# Altium PCB PCB1.PcbDoc
Units mil, origin at the board's own origin, x right, y up, seen from the top; angles counter-clockwise.
Board outline 6000 x 4000 mil, 2 copper layers (Top Layer, Bottom Layer), stack 12.8 mil thick; 24 components, 20 nets, 84 pads, 6 vias.
Unrouted connection lines stored in the file: 1.
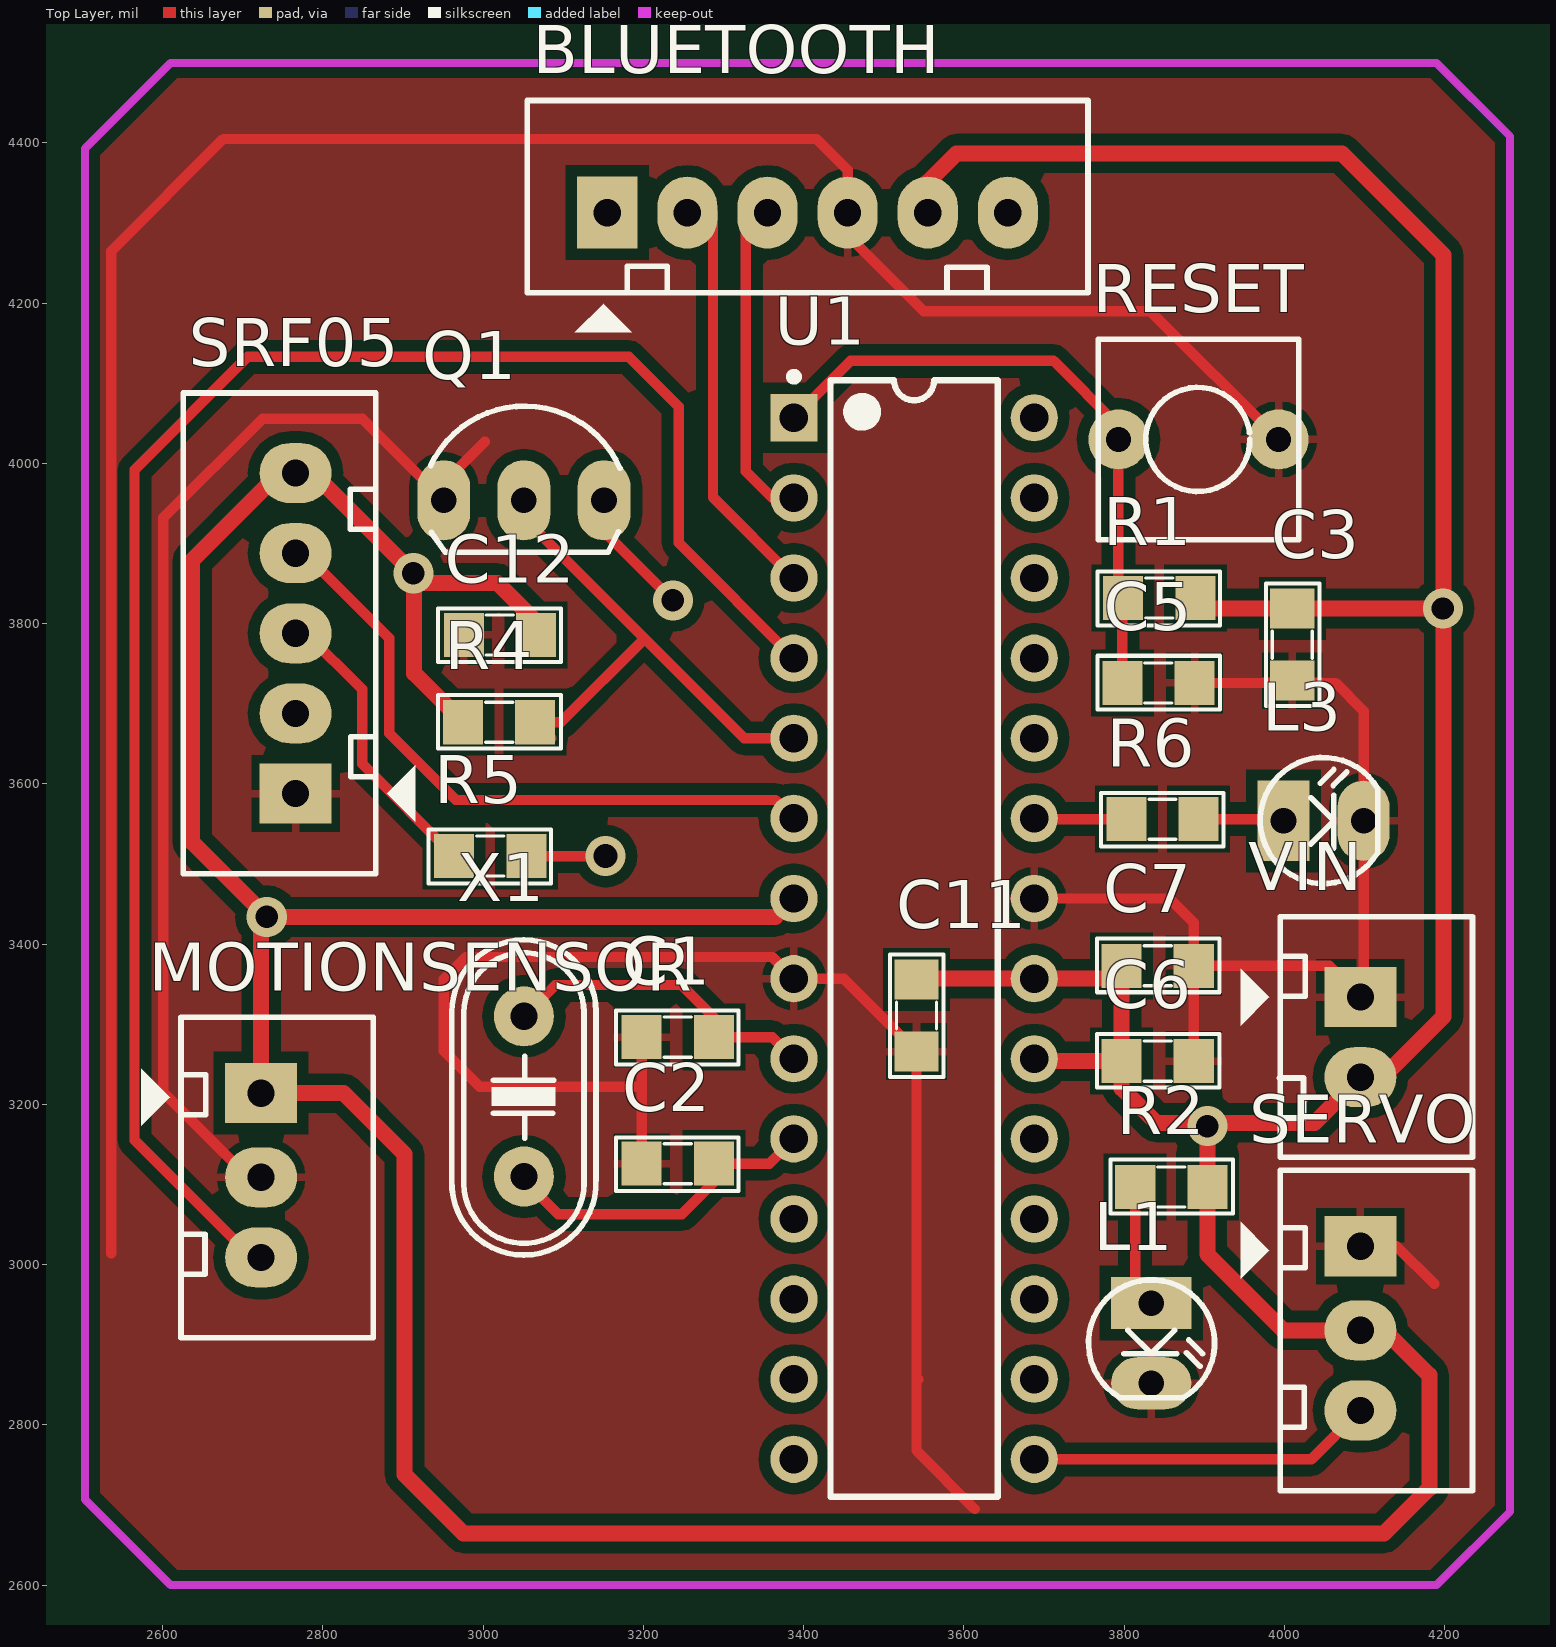
[diagram p0: Top Layer view]
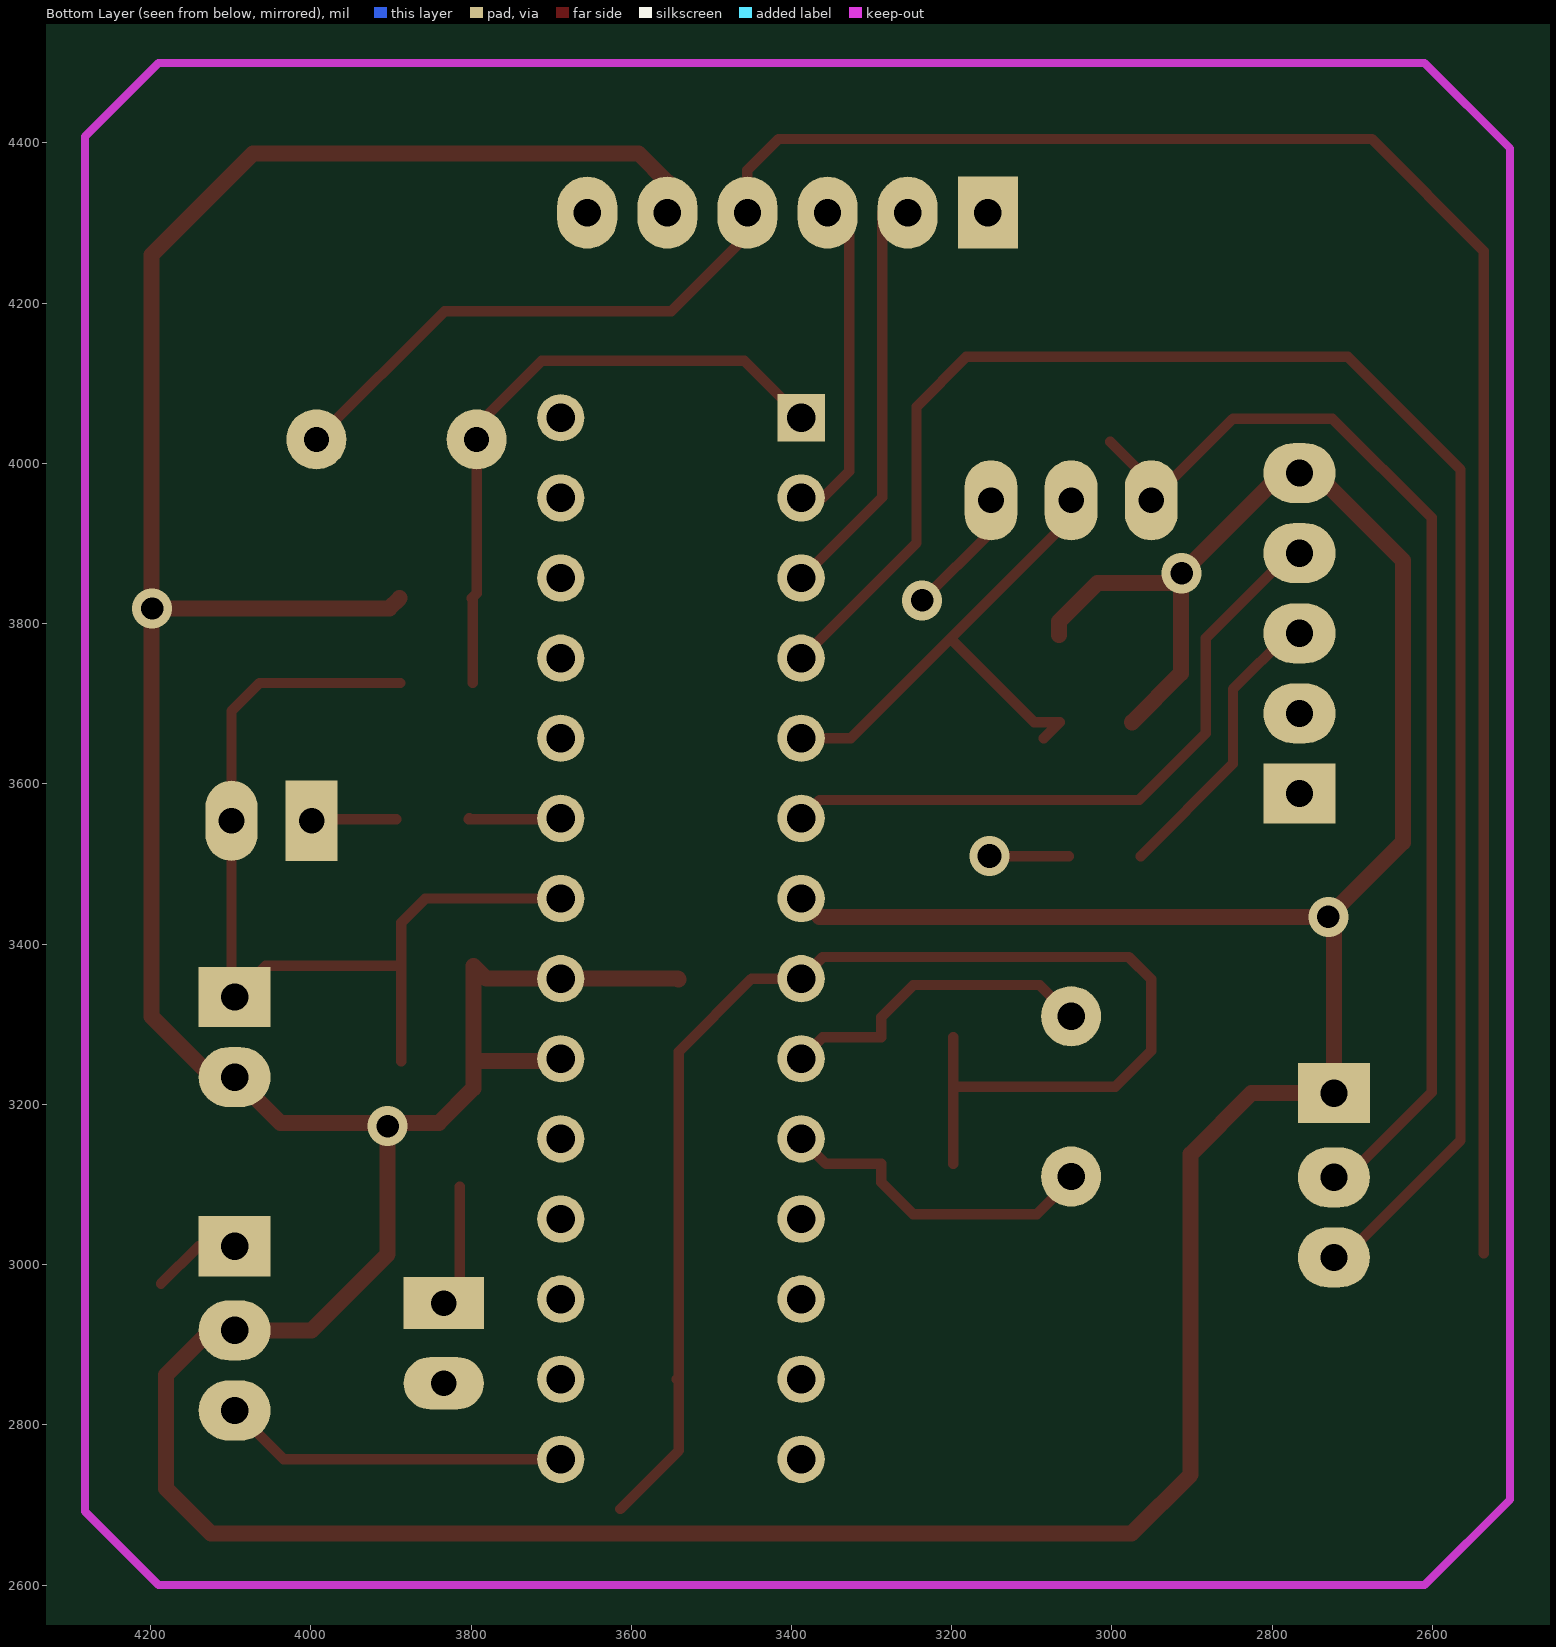
[diagram p1: Bottom Layer view, seen from below]
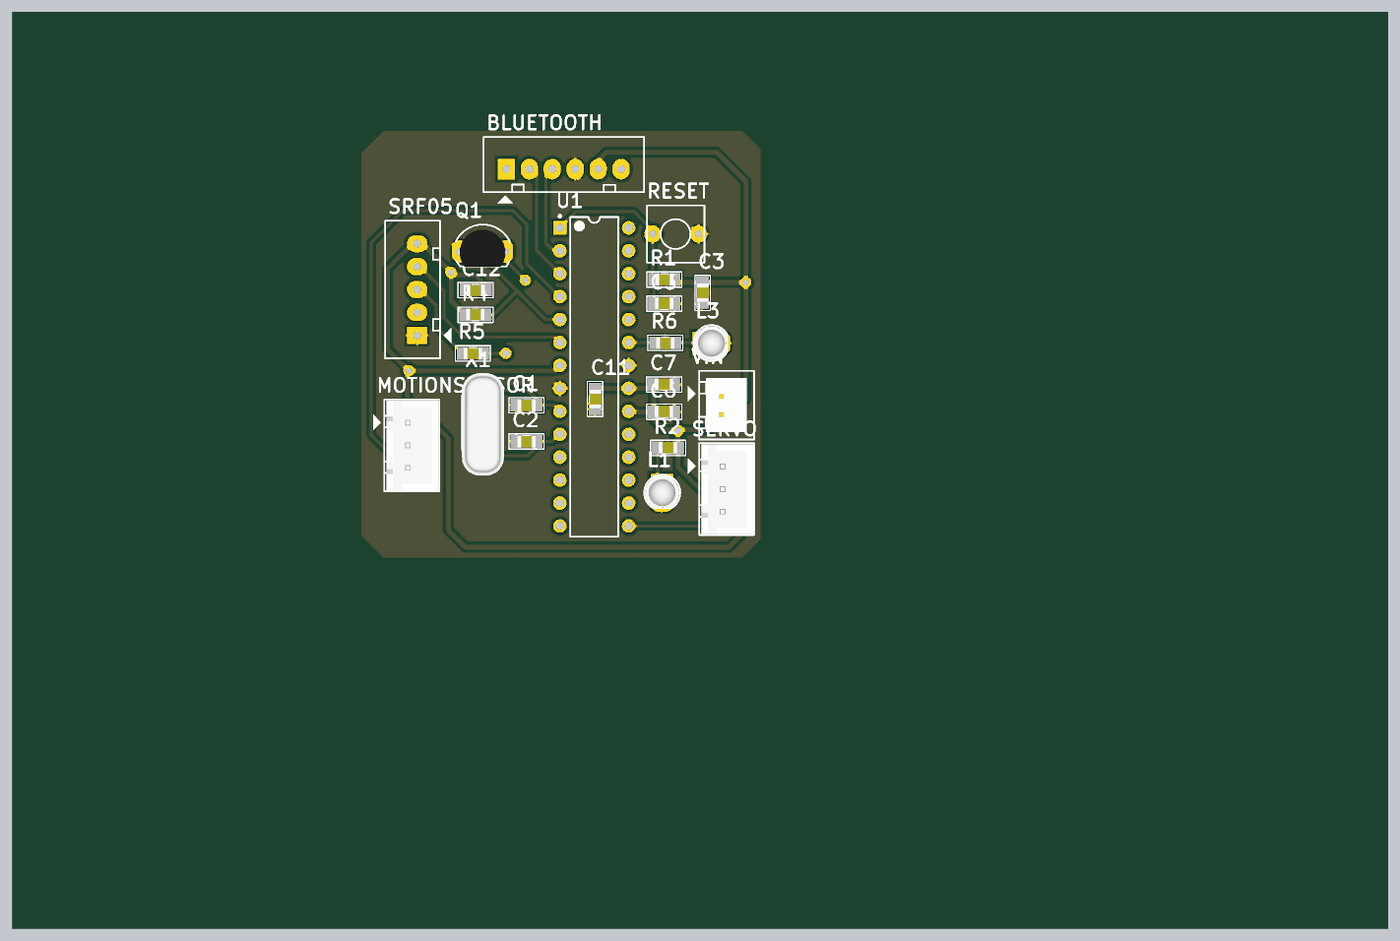
[diagram p2: 3D render of the assembled board from above, using the file's embedded part models]

## Layer stack, top to bottom
Top Layer: signal copper 1.4
Dielectric 1: core 10, FR-4, Dk 4.2
Bottom Layer: signal copper 1.4

## Board outline
1000,1000 7000,1000 7000,5000 1000,5000

## Design rules (kind name [scope] priority, off if disabled: settings)
Clearance [All] p1: gap=14
PolygonConnect [All] p1: connectstyle=Relief reliefconductorwidth=10 reliefentries=4 polygonreliefangle="90 Angle" airgapwidth=10
RoutingVias [All] p1: holewidth=28 width=50 viastyle="Through Hole" minholewidth=28 minwidth=50 maxholewidth=28 maxwidth=50
SolderMaskExpansion [All] p1: expansion=4
UnpouredPolygon [All] p1: allowunpoured=FALSE
Width +5V [InNet('+5V')] p1: maxlimit=40 minlimit=20 preferedwidth=30
Width [All] p2: maxlimit=13 minlimit=13 preferedwidth=13
29 further rules are at their usual default settings.

## Components (designator, comment, footprint, x,y, rotation, side; value= is the part's Value field where it differs from the comment)
BLUETOOTH "JP6" CON6 3155,4313 r0 top
C1 "104" SM-0805 3243,3284 r0 top
C2 "104" SM-0805 3243,3126 r0 top
C3 "104" SM-0805 4010,3774 r90 top
C5 "104" SM-0805 3843,3726 r180 top
C6 "103" SM-0805 3842,3254 r180 top
C7 "103" SM-0805 3842,3373 r180 top
C11 "103" SM-0805 3541,3311 r90 top
C12 "103" SM-0805 3021,3786 r0 top
L1 "LED5V" LED-3 3834,2952 r270 top
L3 "LED3MOTION" LED-3 3999,3554 r0 top
MOTIONSENSOR "JP3" CON3 2723,3209 r270 top
Q1 "C1815" QTO-92 3051,3954 r0 top
R1 "4.7K" SM-0805 3844,3832 r0 top
R2 "220" SM-0805 3859,3097 r180 top
R4 "1k" SM-0805 3020,3677 r180 top
R5 "1k" SM-0805 3009,3510 r0 top
R6 "220" SM-0805 3848,3556 r0 top
RESET "SW" SW2 3793,4030 r0 top
SERVO "JP3" CON3 4095,3018 r270 top
SRF05 "JP5" CON5 2766,3588 r90 top
U1 "ATmega8-16PC" 28P3 3538,3407 r0 top
VIN "JP2" CON2 4095,3334 r270 top
X1 "4Mhz" XT2 3051,3210 r90 top

## Footprints (in the part's own frame and the unit in brackets; to place one, negate y for a bottom-side part, rotate by r counter-clockwise, add the part's x,y. Pads: shape width x height; smd on the part's side, far side on the other; paste and mask are expansions set on the pad)
28P3 [mm] "DIP, 28-Leads, Row Spacing 7.62mm, Pitch 2.54mm, Body 34.67x7.3mm"
  rect 1.5x1.5 hole 0.9: 1(-3.81,16.51)
  round 1.5 hole 0.9: 2(-3.81,13.97) 3(-3.81,11.43) 4(-3.81,8.89) 5(-3.81,6.35) 6(-3.81,3.81) 7(-3.81,1.27) 8(-3.81,-1.27) 9(-3.81,-3.81) 10(-3.81,-6.35) 11(-3.81,-8.89) 12(-3.81,-11.43) 13(-3.81,-13.97) 14(-3.81,-16.51) 15(3.81,-16.51) 16(3.81,-13.97) 17(3.81,-11.43) 18(3.81,-8.89) 19(3.81,-6.35) 20(3.81,-3.81) 21(3.81,-1.27) 22(3.81,1.27) 23(3.81,3.81) 24(3.81,6.35) 25(3.81,8.89) 26(3.81,11.43) 27(3.81,13.97) 28(3.81,16.51)
  silkscreen extent -3.93,-17.7 2.65,17.93, body extent -3.6,-17.65 3.6,17.65, height 4.58
CON2 [mil] "CON2"
  rect 75x90 hole 34: 1(0,0)
  oval 75x90 hole 34: 2(100,0)
  silkscreen extent -100,-150 200,140, body extent -68,-70 168,107, height 236
CON3 [mil] "CON 3"
  rect 75x90 hole 34: 1(-5,0)
  oval 75x90 hole 34: 2(100,0) 3(200,0)
  silkscreen extent -100,-150 300,140, body extent -95,-90 295,136, height 276
CON5 [mil] "CON5"
  rect 75x90 hole 34: 1(0,0)
  oval 75x90 hole 34: 2(100,0) 3(200,0) 4(300,0) 5(400,0)
  silkscreen extent -100,-150 500,140
CON6 [mil] "CON6"
  rect 75x90 hole 34: 1(0,0)
  oval 75x90 hole 34: 2(100,0) 3(200,0) 4(300,0) 5(400,0) 6(500,0)
  silkscreen extent -100,-150 600,140
LED-3 [mil] "LED 2 PIN, 3ly Only colour"
  rect 65x100 hole 32: 1(0,0)
  oval 65x100 hole 32: 2(100,0)
  silkscreen extent -29,-78 118,79, body extent -25,-75 113,75, height 217
QTO-92 [mil] "TO-92"
  oval 66x100 hole 32: 1(-100,0) 2(0,0) 3(100,0)
  silkscreen extent -117,-65 120,118, body extent -109,-66 109,95, height 245
SM-0805 [mil] "Compoment SMD 80x50mil"
  rect 50x55 smd: 1(-45,0) 2(45,0)
  silkscreen extent -77,-34 76,33, body extent -40,-27 40,23, height 24
SW2 [mil] "SW button 2pin, 250x 250 mil"
  round 75 hole 31: 1(0,0) 2(200,0)
  silkscreen extent -25,-125 225,125
XT2 [mil] "Footpin for Crystal 2 pin"
  round 75 hole 34: 1(-100,0) 2(100,0)
  silkscreen extent -198,-90 195,90, body extent -233,-93 213,90, height 138

## Part data
BLUETOOTH: library part Con6, "Connector 6"
C1 C2 C3 C5 C6 C7 C11 C12: library part CM, "Cap SMD"
L1 L3: library part LED, "LED Single colour Green and Red"
MOTIONSENSOR SERVO: library part Con3, "Connector 3"
Q1: "NPN 600mW, ECB"
R1 R2 R4 R5 R6: library part R, "Resistor 1/4W"
RESET: library part SW2, "Switch button 2 pin"
SRF05: library part Con5, "Connector 5"
U1: "8-Bit AVR Microcontroller with 8K Bytes of In-System Programmable Flash Memory"
VIN: library part Con2, "Connector 2"
X1: library part XT3, "Crystal For all Crystal 2pin."

## Via types
v1: diameter 50, hole 28, Top Layer to Bottom Layer, 5 vias
v2: diameter 50, hole 30, Top Layer to Bottom Layer, 1 vias

## Nets (pads, with @x,y where several pads share a name; then routed paths per layer and width w, separated by ;. In a path a pad name is that pad's centre, name@x,y a point inside that pad or via, vN(x,y) a via of type N, cw(c..) or ccw(c..) an arc to the next point about the centre after c; other vN are vias at no path point)
+5V: BLUETOOTH.5 C3.2 C6.2 C7.2 C11.2 C12.2 MOTIONSENSOR.1 R1.2 R2.1 R4.2 SERVO.2 SRF05.5 U1.7 U1.20 U1.21 VIN.2 | length 7762.2
  Top Layer w20: R4.2 2914,3738 2914,3862 v1(2913,3863) ; C12.2 3066,3803 3018,3851 2925,3851 v1(2913,3863) ; U1.7 3365,3434 v1(2730,3434) v1@2723,3441 ; C11.2 3542,3357 U1.21 3781,3357 C7.2 C6.2 ; BLUETOOTH.5 3555,4351 3591,4387 4072,4387 4199,4260 4199,3310 4123,3234 VIN.2 4038,3177 v1@3908,3177 ; U1.20 3691,3254 C6.2 ; R1.2 3902,3819 C3.2 v1(4198,3819) ; v1@2723,3441 MOTIONSENSOR.1 2826,3214 2902,3138 2902,2738 2975.5,2664.5 4124.63,2664.5 4181,2720.87 4181,2862 4125,2918 SERVO.2 3999,2918 3904,3013 R2.1 v1(3904,3173) v1@3908,3177 ; v1@2723,3441 2637,3527 2637,3879 2740,3982 2760,3982 SRF05.5 2788,3988 v1(2913,3863) ; C6.2 3797,3220 3840,3177 v1@3908,3177
ECHO: Q1.2 R4.1 U1.5 | length 678.8
  Top Layer w13: Q1.2@3049,3951 3049,3934 3326,3657 U1.5 ; R4.1@3085,3657 R4.1 3097,3677 3201.5,3781.5
ECHO1: R5.1 SRF05.3 | length 367.6
  Top Layer w13: SRF05.3 2779,3788 2849,3718 2849,3625 R5.1
GND: BLUETOOTH.4 C1.1 C2.1 C3.1 C5.1 C6.1 C7.1 C11.1 C12.1 L1.2 L3.2 MOTIONSENSOR.2 Q1.1 RESET.2 SERVO.1 SRF05.1 U1.8 U1.22 VIN.1 | length 7460.8
  Top Layer w13: 2536,3014 2536,4265 2676,4405 3416,4405 3455,4366 BLUETOOTH.4 3455,4285 3550,4190 3833,4190 RESET.2 ; MOTIONSENSOR.2 2707,3109 2601,3215 2601,3932 2725,4056 2849,4056 Q1.1 2951,3976 3002,4027 ; C2.1 3198,3222 ; C1.1 3198,3222 ; 3541,2859 3543,2857 ; 3614,2695 3541,2768 C11.1 3450,3357 U1.8 3361,3384 2979,3384 2951,3356 2951,3267 2996,3222 3198,3222 ; U1.22 3857,3457 3887,3427 C7.1 ; C6.1 C7.1 ; C5.1 4064,3726 4099,3691 L3.2 4099,3338 VIN.1 4056,3373 C7.1 ; SERVO.1 4140,3023 4187,2976
IF: MOTIONSENSOR.3 U1.4 | length 2192.2
  Top Layer w13: MOTIONSENSOR.3 2711,3009 2565,3155 2565,3992 2706,4133 3182,4133 3244,4071 3244,3901 U1.4
KEY: BLUETOOTH.6
LED1: R6.1 U1.23 | length 116.8
  Top Layer w13: U1.23 3689,3556 R6.1 R6.1@3802,3557
NetL1_1: L1.1 R2.2 | length 153.3
  Top Layer w13: R2.2 3814,2972 L1.1
NetL3_1: L3.1 R6.2 | length 106.8
  Top Layer w13: R6.2 3997,3556 L3.1
NetQ1_3: Q1.3 R5.2 | length 259.6
  Top Layer w13: R5.2 v2(3153,3510) ; Q1.3 3151,3915 v1(3237,3829)
OSC1: C1.2 U1.9 X1.2 | length 405.9
  Top Layer w13: X1.2 3090,3349 3248,3349 3288,3309 C1.2 3361,3284 U1.9
OSC2: C2.2 U1.10 X1.1 | length 411.2
  Top Layer w13: X1.1 3051,3106 3094,3063 3248,3063 3288,3103 C2.2 3357,3126 U1.10
OUT: SRF05.2
PWM: SERVO.3 U1.15 | length 432.3
  Top Layer w13: U1.15 4034,2757 SERVO.3
RESET: C5.2 R1.1 RESET.1 U1.1 | length 791.9
  Top Layer w13: U1.1 3459,4128 3712,4128 3793,4047 RESET.1 3793,3838 R1.1 3798,3831 C5.2
RX: BLUETOOTH.3 U1.2 | length 407.9
  Top Layer w13: BLUETOOTH.3 3328,4286 3328,3990 3361,3957 U1.2
STATE: BLUETOOTH.1
TRIG: SRF05.4 U1.6 | length 828.8
  Top Layer w13: SRF05.4 2777,3888 2883,3782 2883,3663 2966,3580 3365,3580 U1.6
TX: BLUETOOTH.2 U1.3 | length 529.8
  Top Layer w13: BLUETOOTH.2 3287,4313 3287,3958 U1.3
VCC: 
pads on no net: U1.11 U1.12 U1.13 U1.14 U1.16 U1.17 U1.18 U1.19 U1.24 U1.25 U1.26 U1.27 U1.28
copper on no net: | length 5
  Top Layer w10: 2951,3949 2951,3954

## Polygon pours and split planes (outlines as drawn)
GND on Top Layer "Top Layer-No Net" (solid, remove dead copper, pour order 9): 2610,4500 2503,4393 2503,2707 2610,2600 4190,2600 4282,2692 4282,4408 4190,4500 2610,4500
GND on Top Layer "Top Layer-No Net" (solid, remove dead copper, shelved, pour order 5): 4195,2605 4282,2692 4282,4408 4190,4500 2610,4500 2503,4393 2503,2707 2610,2600 4190,2600
GND on Top Layer "Top Layer-No Net" (solid, shelved, pour order 3): 2610,4500 2503,4393 2503,2707 2610,2600 4190,2600 4282,2692 4282,4408 4190,4500 2610,4500

## Keep-outs
Keep-Out Layer:
  lines w10: 2503,2707 2503,4393 2610,4500 4190,4500 4282,4408 4282,2692 4190,2600 2610,2600 2503,2707